# Altium PCB ui_main.PcbDoc (part 2 of 3)
Units mil, origin at the board's own origin, x right, y up, seen from the top; angles counter-clockwise.
Board outline 7342.57 x 2614.56 mil, 2 copper layers (Top Layer, Bottom Layer); 207 components, 158 nets, 707 pads, 687 vias.
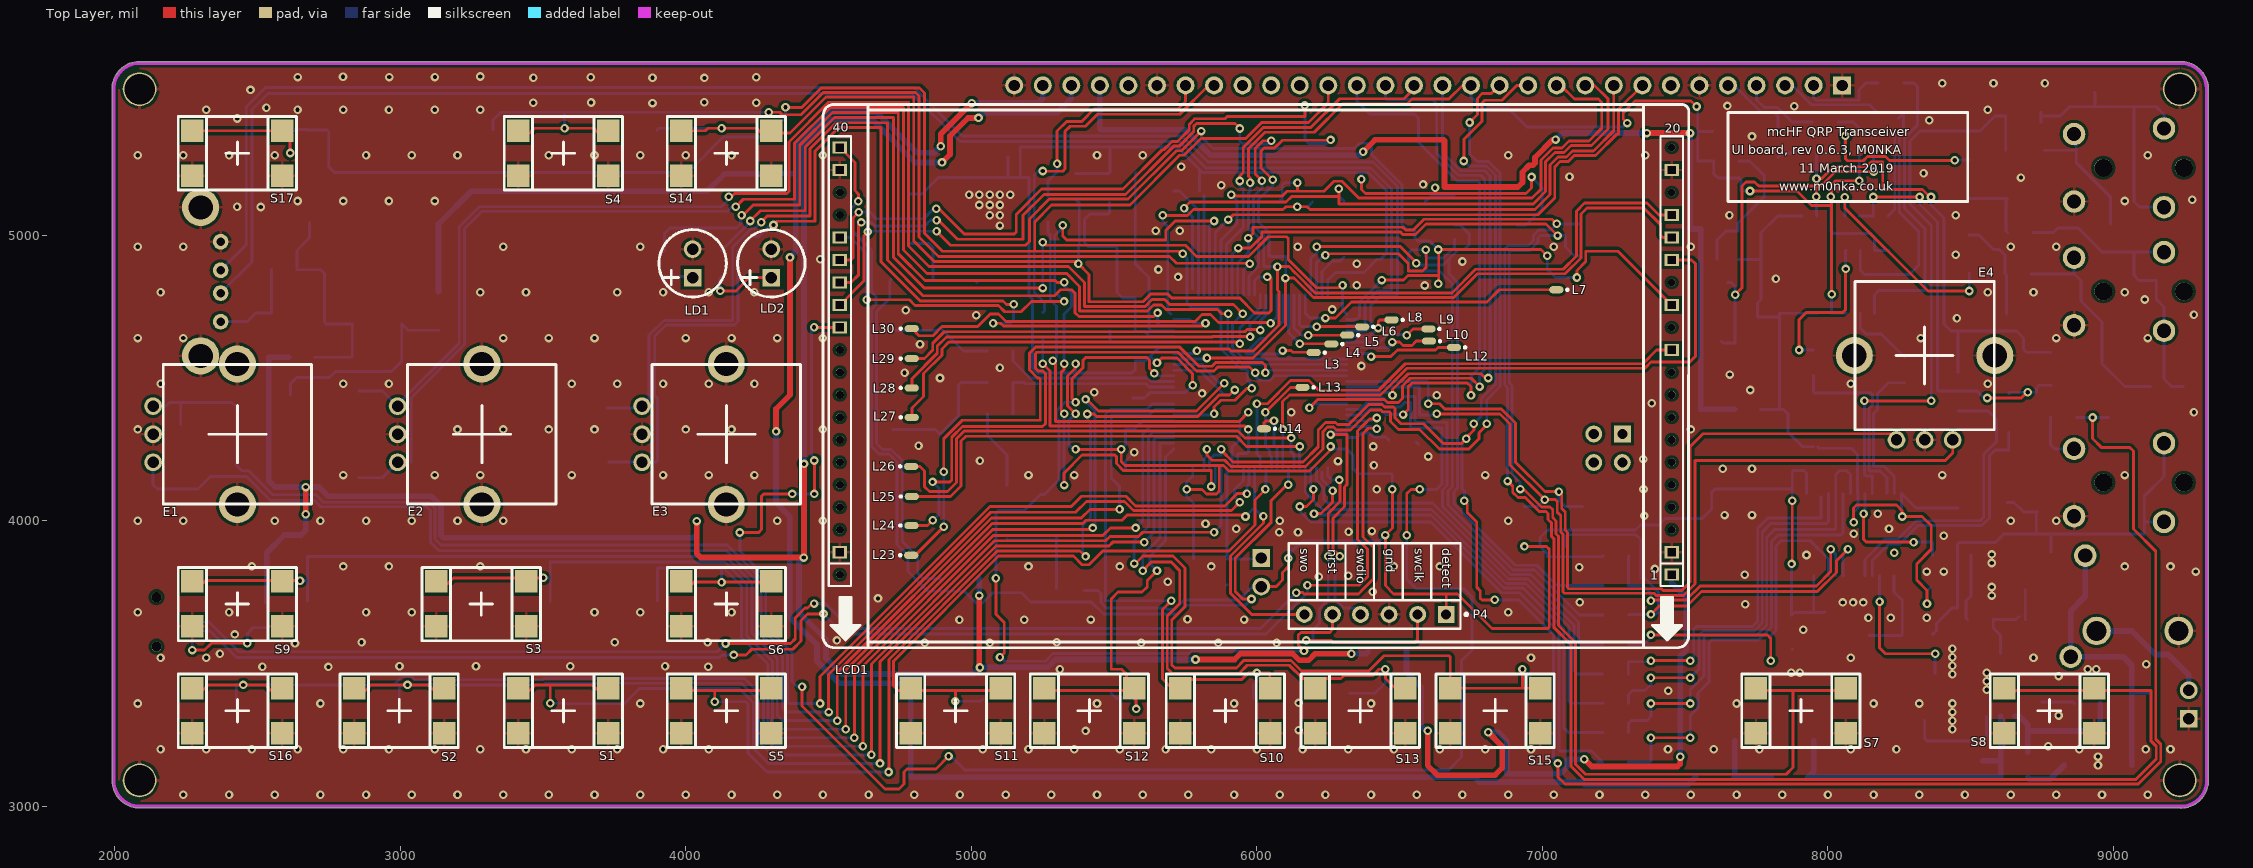
[diagram p0: Top Layer view]

## Via types
v1: diameter 30, hole 15, Top Layer to Bottom Layer, 687 vias

## Nets (pads, with @x,y where several pads share a name; then routed paths per layer and width w, separated by ;. In a path a pad name is that pad's centre, name@x,y a point inside that pad or via, vN(x,y) a via of type N, cw(c..) or ccw(c..) an arc to the next point about the centre after c; other vN are vias at no path point) (continued)
NetC95_2: C95.2 RFC3.1 U5.4 | length 358.9
  Bottom Layer w10: U5.4@5124.21,3935.51 5126.66,3933.07 C95.2@5304.86,3933.07 ; RFC3.1@5298.22,3762.41 C95.2@5298.22,3939.7
NetC96_1: C96.1 R45.2 R46.1 | length 1223.4
  Bottom Layer w10: R46.1@4718.86,4844.78 4714,4839.92 4714,4779 4668,4733 4668,4271 4689,4250 4719,4250 4758,4211 4758,3927 4795.11,3889.89 C96.1@4812,3889.89 4812,3816 4830.22,3797.78 R45.2@4890.86,3797.78
NetC97_1: C97.1 R46.2 U6.1 | length 360.1
  Bottom Layer w10: U6.1@4783.53,4971.39 4850.61,4971.39 4865.14,4956.86 4865.14,4842.22 5012.78,4842.22 C97.1@5020,4835